# Altium PCB Middle board.PcbDoc
Units mm, origin at the board's own origin, x right, y up, seen from the top; angles counter-clockwise.
Board outline 50 x 20 mm, 2 copper layers (Top, Bottom); 27 components, 22 nets, 93 pads, 0 vias.
Unrouted connection lines stored in the file: 47.
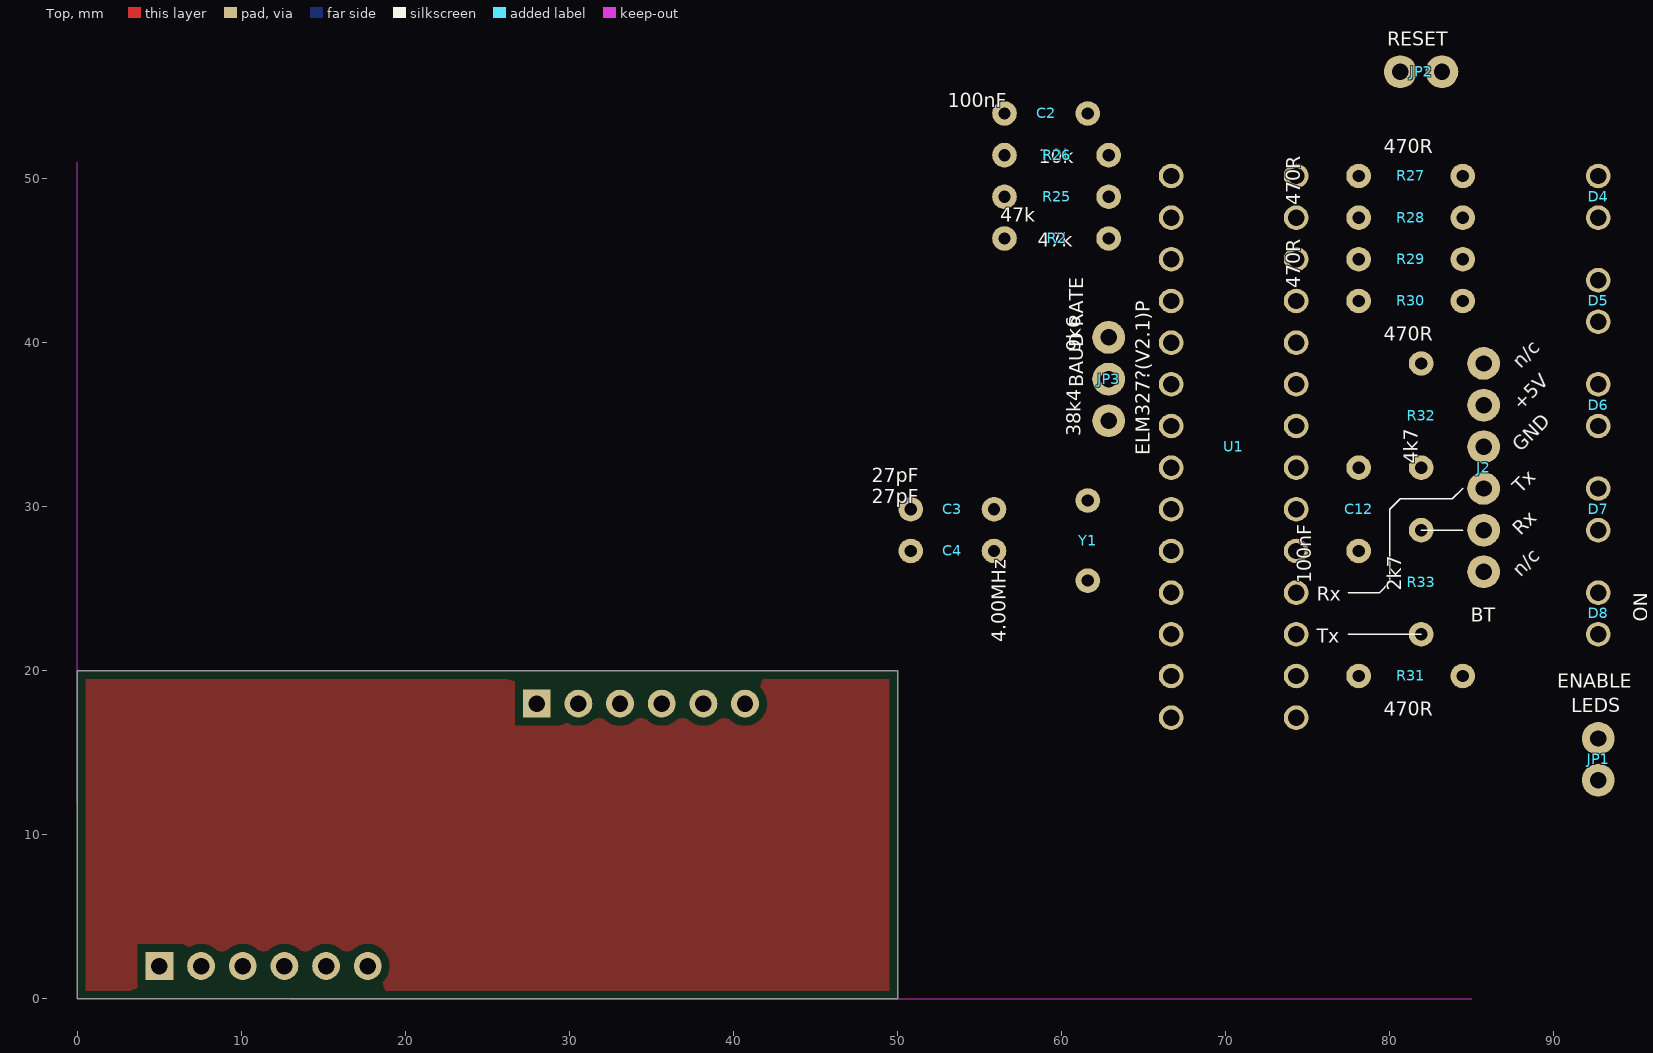
[diagram p0: Top view]
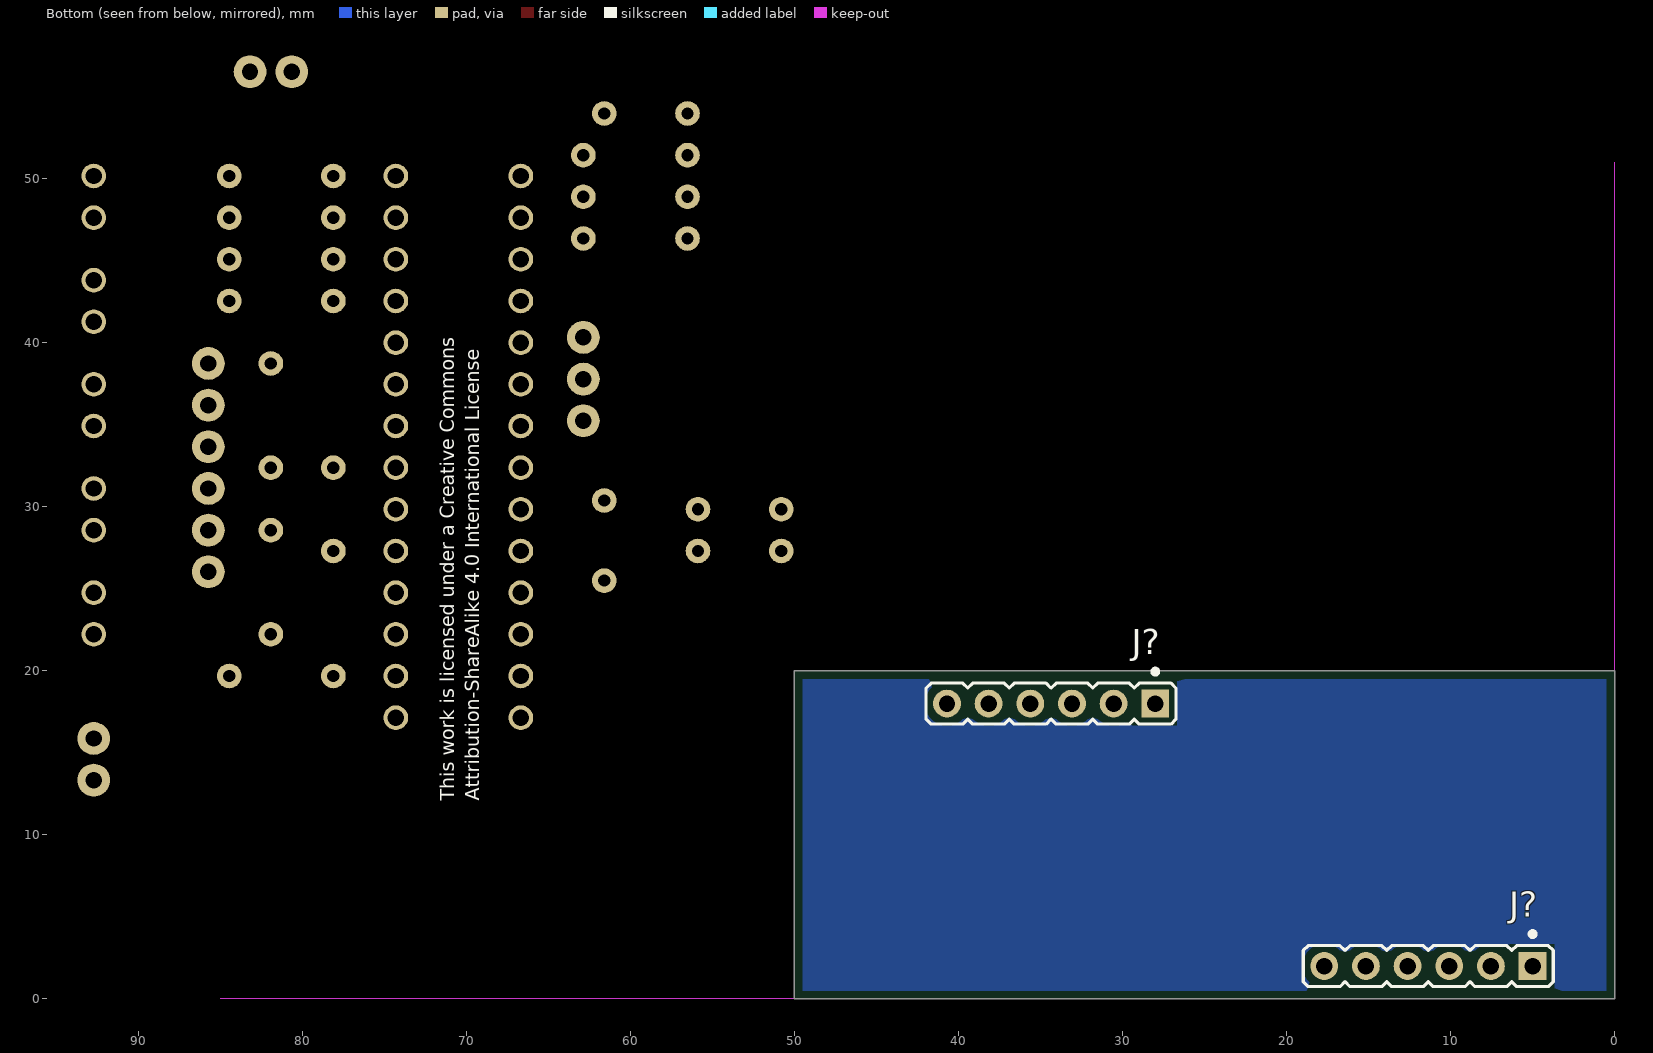
[diagram p1: Bottom view, seen from below]

## Layer stack, top to bottom
Top Solder: solder mask 0.0102, Solder Resist, Dk 3.5
Top: signal copper 0.035
Dielectric 1: dielectric 0.32, FR-4, Dk 4.8
Bottom: signal copper 0.035
Bottom Solder: solder mask 0.0102, Solder Resist, Dk 3.5

## Board outline
0,20 50,20 50,0 0,0

## Design rules (kind name [scope] priority, off if disabled: settings)
BoardOutlineClearance mdCopperDimension [All] p1: gap=0.254 ignorepadtopadclearanceinfootprint=FALSE except(0: Arc-SplitContinuation Track-SplitContinuation SMDPad-SplitContinuation THPad-SplitContinuation Via-SplitContinuation Fill-SplitContinuation Poly-SplitContinuation Region-SplitContinuation Text-SplitContinuation; 0.5: Poly-OutlineEdge Poly-CavityEdge Poly-CutoutEdge Poly-SplitBarrior)
Clearance Clearance_for_PolygonClass_Isolate_19,69 [InPolygonClass('Isolate_19,69') vs IsArc Or IsTrack Or IsPad Or IsVia Or IsFill Or IsRegion Or IsText] p1: gap=0.5 ignorepadtopadclearanceinfootprint=FALSE
Clearance "Clearance (Same Net)" [All] p2: gap=0.5 ignorepadtopadclearanceinfootprint=FALSE
Clearance [All] p3: gap=0.5 ignorepadtopadclearanceinfootprint=FALSE
HoleSize [All] p1: absolutevalues=TRUE maxlimit=2540 minlimit=0.5 maxpercent=80.000 minpercent=20.000
HoleToHoleClearance mdDrill [All] p1: gap=0.5 allowstackedmicrovias=TRUE
MinimumSolderMaskSliver [All] p1 off: minsoldermaskwidth=0.254
PasteMaskExpansion mlMinCreamFrame [All] p1: expansion=0
PolygonConnect PolygonConnect_For_PolygonThermal_ON_Width0_Gap196850 [InPolygonClass('PolygonThermal_ON_Width0_Gap196850') vs Not IsVia] p1: connectstyle=Relief reliefconductorwidth=0 reliefentries=4 polygonreliefangle="90 Angle" airgapwidth=0.5
PolygonConnect PolygonConnect_For_PolygonThermal_ON_Width196900_Gap196850 [InPolygonClass('PolygonThermal_ON_Width196900_Gap196850') vs Not IsVia] p2: connectstyle=Relief reliefconductorwidth=0.5 reliefentries=4 polygonreliefangle="90 Angle" airgapwidth=0.5
PolygonConnect ThermalVias [IsVia] p3: connectstyle=Direct reliefconductorwidth=0.254 reliefentries=4 polygonreliefangle="90 Angle" airgapwidth=0.254
PolygonConnect [All] p4: connectstyle=Relief reliefconductorwidth=0.254 reliefentries=4 polygonreliefangle="90 Angle" airgapwidth=0.254
RoutingVias [All] p1: holewidth=0.5 width=1 viastyle="Through Hole" minholewidth=0.5 minwidth=1 maxholewidth=2.54 maxwidth=2.54
SolderMaskExpansion mlMinStopFrame [All] p1: expansion=0.05 istentingtop=FALSE
SupplyNets "Schematic Supply Nets_2" [InNet('+5V')] p1: voltage=0.000
SupplyNets "Schematic Supply Nets_1" [InNet('GND')] p2: voltage=0.000
SupplyNets "Schematic Supply Nets" [InNet('+12V')] p3: voltage=0.000
Width [All] p1: maxlimit=0.254 minlimit=0.5 preferedwidth=0.5
26 further rules are at their usual default settings.

## Components (designator, comment, footprint, x,y, rotation, side; value= is the part's Value field where it differs from the comment)
C2 "100nF" MLCC-5.08 59.055,53.975 r180 top
C3 "27pF" MLCC-5.08 53.34,29.845 r180 top
C4 "27pF" MLCC-5.08 53.34,27.305 r180 top
C12 "100nF" MLCC-5.08 78.105,29.845 r270 top
D4 "OBD Tx" LED_5MM 92.71,48.895 r90 top
D5 "OBD Rx" LED_5MM 92.71,42.545 r90 top
D6 "RS232 Tx" LED_5MM 92.71,36.195 r90 top
D7 "RS232 Rx" LED_5MM 92.71,29.845 r90 top
D8 "ON" LED_5MM 92.71,23.495 r90 top
J2 "RS232" HEADER_1X6 85.725,32.385 r90 top
J? "Header 6" 3M_961106-6404-AR 28,18 r0 bottom
J? "Header 6" 3M_961106-6404-AR 5,2 r0 bottom
JP1 "ENABLE LEDS" HEADER_1X2 92.71,14.605 r90 top
JP2 "FACTORY RESET" HEADER_1X2 81.915,56.515 r0 top
JP3 "BAUD RATE" HEADER_1X3 62.865,37.782 r90 top
R2 "47k" MF12-1/8W 59.69,46.355 r0 top
R25 "47k" MF12-1/8W 59.69,48.895 r180 top
R26 "10k" MF12-1/8W 59.69,51.435 r0 top
R27 "470R" MF12-1/8W 81.28,50.165 r0 top
R28 "470R" MF12-1/8W 81.28,47.625 r0 top
R29 "470R" MF12-1/8W 81.28,45.085 r0 top
R30 "470R" MF12-1/8W 81.28,42.545 r0 top
R31 "470R" MF12-1/8W 81.28,19.685 r0 top
R32 "4k7" MF12-1/8W 81.915,35.56 r270 top
R33 "2k7" MF12-1/8W 81.915,25.4 r90 top
U1 "ELM327?(V2.1)P" SPDIP(28) 70.485,33.655 r0 top
Y1 "4.00MHz" HC49 61.595,27.94 r270 top

## Footprints (in the part's own frame and the unit in brackets; to place one, negate y for a bottom-side part, rotate by r counter-clockwise, add the part's x,y. Pads: shape width x height; smd on the part's side, far side on the other; paste and mask are expansions set on the pad)
3M_961106-6404-AR [mm] "6 Contacts, Straight .100\" x .100\" Pin Strip Header, 961 Series"
  rect 1.7x1.7 hole 1: 1(0,0)
  round 1.7 hole 1: 2(2.54,0) 3(5.08,0) 4(7.62,0) 5(10.16,0) 6(12.7,0)
  silkscreen extent -1.26,-2.1 13.98,1.25, body extent -1.27,-1.25 13.98,1.25, height 9.3
HC49 [mm] "HC49"
  round 1.5 hole 0.75: 1(-2.44,0) 2(2.44,0)
  body extent -3.2,-0.76 3.2,0.76, height 1.27
HEADER_1X2 [mm] "HEADER_1X2"
  round 2 hole 1: 1(-1.27,0) 2(1.27,0)
  body extent -2.28,-1.01 2.28,1.01, height 3.81
HEADER_1X3 [mm] "HEADER_1X3"
  round 2 hole 1: 1(-2.54,0) 2(0,0) 3(2.54,0)
  body extent -3.55,-1.01 3.55,1.01, height 3.81
HEADER_1X6 [mm] "HEADER_1X6"
  round 2 hole 1: 1(-6.35,0) 2(-3.81,0) 3(-1.27,0) 4(1.27,0) 5(3.81,0) 6(6.35,0)
  body extent -7.36,-1.01 7.36,1.01, height 3.81
LED_5MM [mm] "LED_5MM"
  round 1.5 hole 1: A(-1.27,0) C(1.27,0)
  body extent -2.03,-0.76 2.03,0.76, height 1.27
MF12-1/8W [mm] "MF12-1/8W"
  round 1.5 hole 0.75: 1(-3.175,0) 2(3.175,0)
  body extent -3.93,-0.76 3.93,0.76, height 1.27
MLCC-5.08 [mm] "MLCC-5.08"
  round 1.5 hole 0.75: +(-2.54,0) -(2.54,0)
  body extent -3.3,-0.76 3.3,0.76, height 1.27
SPDIP(28) [mm] "SPDIP(28)"
  round 1.5 hole 1: 1(-3.81,16.51) 2(-3.81,13.97) 3(-3.81,11.43) 4(-3.81,8.89) 5(-3.81,6.35) 6(-3.81,3.81) 7(-3.81,1.27) 8(-3.81,-1.27) 9(-3.81,-3.81) 10(-3.81,-6.35) 11(-3.81,-8.89) 12(-3.81,-11.43) 13(-3.81,-13.97) 14(-3.81,-16.51) 15(3.81,-16.51) 16(3.81,-13.97) 17(3.81,-11.43) 18(3.81,-8.89) 19(3.81,-6.35) 20(3.81,-3.81) 21(3.81,-1.27) 22(3.81,1.27) 23(3.81,3.81) 24(3.81,6.35) 25(3.81,8.89) 26(3.81,11.43) 27(3.81,13.97) 28(3.81,16.51)
  body extent -4.57,-17.27 4.57,17.27, height 1.27

## Part data
C2 C3 C4 C12: library part C(MLCC-5.08), DeviceName=(MLCC-5.08), DeviceSetName=C, GateName_1=G$1, LibraryName=Capacitor, SymbolName_1=C
D4 D5 D6 D7 D8: library part LED(?)5MM, DeviceName=5MM, DeviceSetName=LED(?), GateName_1=G$1, LibraryName=diode, SymbolName_1=LED
J2: library part HEADER_1X6, DeviceSetName=HEADER_1X6, GateName_1=G$1, LibraryName=HEADERS, SymbolName_1=HEADER_1X6
J? J?: library part 3M_961106-6404-AR, "Connector 6 Male", Manufacturer=3M, Manufacturer Part Number=961106-6404-AR, Author="CERN DEM MR", Component Type=Standard, ComponentHeight=8mm, CreateDate=05.09.2016, Family="Header 6", HelpURL=\\cern.ch\dfs\Applications\Altium\Datasheets\3M_961106-6404-AR.pdf, LatestRevisionDate=05.09.2016, Mounted=Yes, Part Description="6 Contacts, Straight .100\" x .100\" Pin Strip Header, 961 Series", Part Number=3M_961106-6404-AR, Pin Count=6, PressFit=No, Sense=No, SMD=No, Socket=No, Status=None
JP1 JP2: library part HEADER_1X2, DeviceSetName=HEADER_1X2, GateName_1=G$1, LibraryName=HEADERS, SymbolName_1=HEADER_1X2
JP3: library part HEADER_1X3, DeviceSetName=HEADER_1X3, GateName_1=G$1, LibraryName=HEADERS, SymbolName_1=HEADER_1X3
R2 R25 R26 R27 R28 R29 R30 R31 R32 R33: library part R-EU-?MF12-1/8W, DeviceName=MF12-1/8W, DeviceSetName=R-EU-?, GateName_1=G$1, LibraryName=Resistor, SymbolName_1=R-EU
U1: "ELM327 - OBD to RS232 Interpreter (v2.1) based on Microchip Technology Inc.'s PIC18F2480 (www.microchip.com)    All versions of the ELM327 support the standard OBDII protocols. In addition, the IC supports various other protocols to varying degrees.   Version 2.1 is the most recent revision.   More info on Elm Electronics Inc..", J1850Volts="J1850 Volts", !MCLR=M\C\L\R\, Baudrate="Baud rate", CANRx="CAN Rx", CANTx="CAN Tx", DeviceName=P, DeviceSetName=ELM327?(V2.1), GateName_1=G$1, IgnMon/!RTS="IgnMon / R\T\S\", ISOIn="ISO In", ISOK="ISO K", ISOL="ISO L", J1850Bus+="J1850 Bus+", J1850Bus-="J1850 Bus-", LFmode=LFmode, LibraryName="Elm Electronics", Memory=Memory, OBDRxLED="OBD Rx LED", OBDTxLED="OBD Tx LED", PWMIn="PWM In", PwrCtrl/Busy="PwrCtrl / Busy", RS232Rx="RS232 Rx", RS232RxLED="RS232 Rx LED", RS232Tx="RS232 Tx", RS232TxLED="RS232 Tx LED", SymbolName_1=ELM327-V2.1, Vdd=Vdd, Vmeasure=Vmeasure, VPWIn="VPW In", Vss=Vss, XT1=XT1, XT2=XT2
Y1: library part HUS-4.000-18-30/50/-40+85, DeviceSetName=HUS-4.000-18-30/50/-40+85, GateName_1=G$1, LibraryName=crystal, SymbolName_1=CRYSTAL

## Nets (pads, with @x,y where several pads share a name; then routed paths per layer and width w, separated by ;. In a path a pad name is that pad's centre, name@x,y a point inside that pad or via, vN(x,y) a via of type N, cw(c..) or ccw(c..) an arc to the next point about the centre after c; other vN are vias at no path point)
+5V: C12.+ J2.5 JP1.1 JP3.1 U1.1 U1.5 U1.7 U1.15 U1.20
+12V: R25.2
GND: C2.- C3.- C4.- C12.- J2.4 JP2.2 JP3.3 R26.1 R32.1 U1.8 U1.19
NetC2_+: C2.+ R25.1 R26.2 U1.2
NetC3_+: C3.+ U1.9 Y1.1
NetC4_+: C4.+ U1.10 Y1.2
NetD4_A: D4.A D5.A D6.A D7.A D8.A JP1.2
NetD4_C: D4.C R27.2
NetD5_C: D5.C R28.2
NetD6_C: D6.C R29.2
NetD7_C: D7.C R30.2
NetD8_C: D8.C R31.2
NetJ2_2: J2.2 R32.2 R33.2
NetJ2_3: J2.3 U1.18
NetJP2_1: JP2.1 R27.1 U1.28
NetJP3_2: JP3.2 U1.6
NetR2_2: R2.2 U1.3
NetR28_1: R28.1 U1.27
NetR29_1: R29.1 U1.26
NetR30_1: R30.1 U1.25
NetR31_1: R31.1 U1.16
NetR33_1: R33.1 U1.17
pads on no net: J2.1 J2.6 J?.1 J?.2 J?.3 J?.4 J?.5 J?.6 R2.1 U1.4 U1.11 U1.12 U1.13 U1.14 U1.21 U1.22 U1.23 U1.24

## Polygon pours and split planes (outlines as drawn)
GND on Top "GND_L01_P018" (solid, pour order 18): 0,0 0,20 50,20 50,0
GND on Bottom "GND_L02_P019" (solid, pour order 19): 0,0 0,20 50,20 50,0

## Keep-outs
Keep-Out Layer:
  lines w0: 0,12 0,51 ; 13,0 85,0

## Silkscreen, mask and mechanical layers (free items; w line width, h text height)
Top Overlay:
  lines w0.1: 77.47,22.225 81.915,22.225 ; 77.47,24.765 79.375,24.765 80.01,25.4 80.01,29.845 80.645,30.48 83.82,30.48 84.455,31.115 ; 81.915,28.575 84.455,28.575
  text "FACTORY" at 78.998,59.613 h0.85
  text "RESET" at 79.847,58.113 h0.85
  text "Tx" at 97.03,48.102 h0.85 r90
  text "OBD" at 97.03,44.502 h0.85 r90
  text "Rx" at 97.03,41.752 h0.85 r90
  text "9k6" at 61.152,39.474 h0.85 r90
  text "n/c" at 87.991,38.374 h0.85 r45
  text "+5V" at 87.991,35.834 h0.85 r45
  text "Tx" at 97.03,35.402 h0.85 r90
  text "38k4" at 61.152,34.29 h0.85 r90
  text "GND" at 87.991,33.294 h0.85 r45
  text "BT" at 97.03,32.227 h0.85 r90
  text "Tx" at 87.991,30.754 h0.85 r45
  text "Rx" at 97.03,29.052 h0.85 r90
  text "Rx" at 87.991,28.214 h0.85 r45
  text "n/c" at 87.991,25.674 h0.85 r45
  text "Rx" at 75.565,24.255 h0.85
  text "BT" at 84.932,22.985 h0.85
  text "Tx" at 75.565,21.715 h0.85
  text "ENABLE" at 90.217,18.973 h0.85
  text "LEDS" at 91.067,17.473 h0.85
Bottom Overlay:
  text "Attribution-ShareAlike 4.0 International License" at 69.225,12.065 h0.85 r270
  text "This work is licensed under a Creative Commons" at 70.725,12.065 h0.85 r270
Dimension:
  lines w0: 0,12 ccw(c2.5,12) 2.5,9.5 6.5,9.5 cw(c6.5,5.5) 10.5,5.5 10.5,2.5 ccw(c13,2.5) 13,0 85,0 ccw(c85,2.5) 87.5,2.5 87.5,5.5 cw(c91.5,5.5) 91.5,9.5 95.5,9.5 ccw(c95.5,12) 98,12 98,51 ccw(c95.5,51) 95.5,53.5 91.5,53.5 cw(c91.5,57.5) 87.5,57.5 87.5,60.5 ccw(c85,60.5) 85,63 13,63 ccw(c13,60.5) 10.5,60.5 10.5,57.5 cw(c6.5,57.5) 6.5,53.5 2.5,53.5 ccw(c2.5,51) 0,51 0,12
Measures:
  circle w0.1: c91.5,5.5 r1.7
  circle w0.1: c91.5,5.5 r2.95
  circle w0.1: c91.5,57.5 r1.7
  circle w0.1: c91.5,57.5 r2.95
  circle w0.1: c6.5,57.5 r1.7
  circle w0.1: c6.5,57.5 r2.95
  circle w0.1: c6.5,5.5 r1.7
  circle w0.1: c6.5,5.5 r2.95
  lines w0: -4,-3 ccw(c-3,-3) -3,-4 101,-4 ccw(c101,-3) 102,-3 102,66 ccw(c101,66) 101,67 -3,67 ccw(c-3,66) -4,66 -4,-3 ; -1,0 ccw(c0,0) 0,-1 98,-1 ccw(c98,0) 99,0 99,63 ccw(c98,63) 98,64 0,64 ccw(c0,63) -1,63 -1,0

## Dimensions
-4,0 to -4,63 on tFinish
0,-4 to 98,-4 on tFinish